# Altium PCB TetrisPlaca.PcbDoc
Units mil, origin at the board's own origin, x right, y up, seen from the top; angles counter-clockwise.
Board outline 3950 x 1780 mil, 2 copper layers (Top Layer, Bottom Layer); 63 components, 28 nets, 142 pads, 0 vias.
Unrouted connection lines stored in the file: 1.
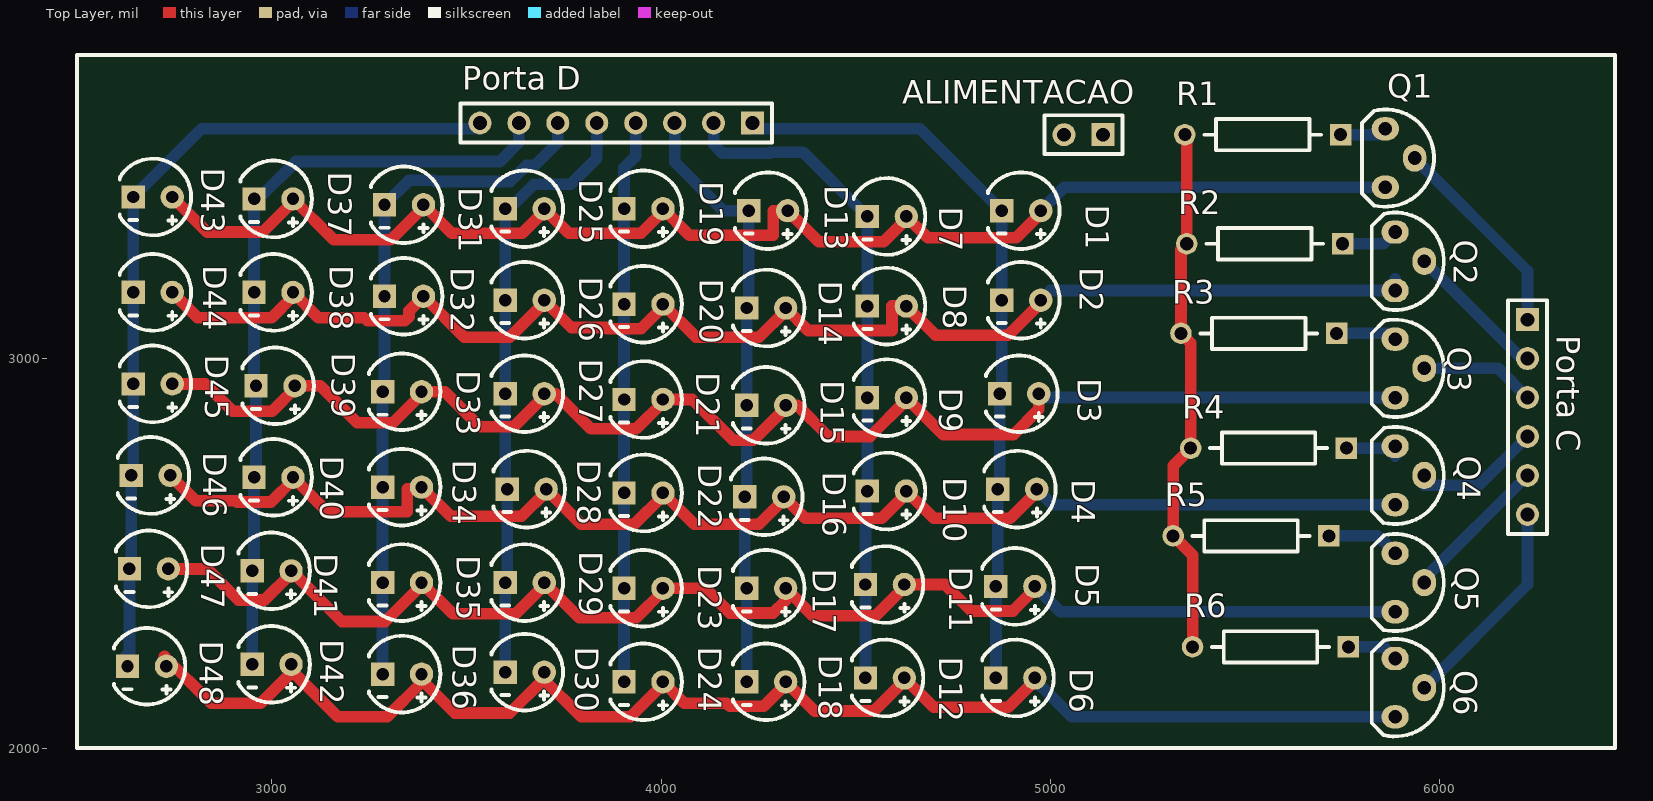
[diagram p0: Top Layer view]
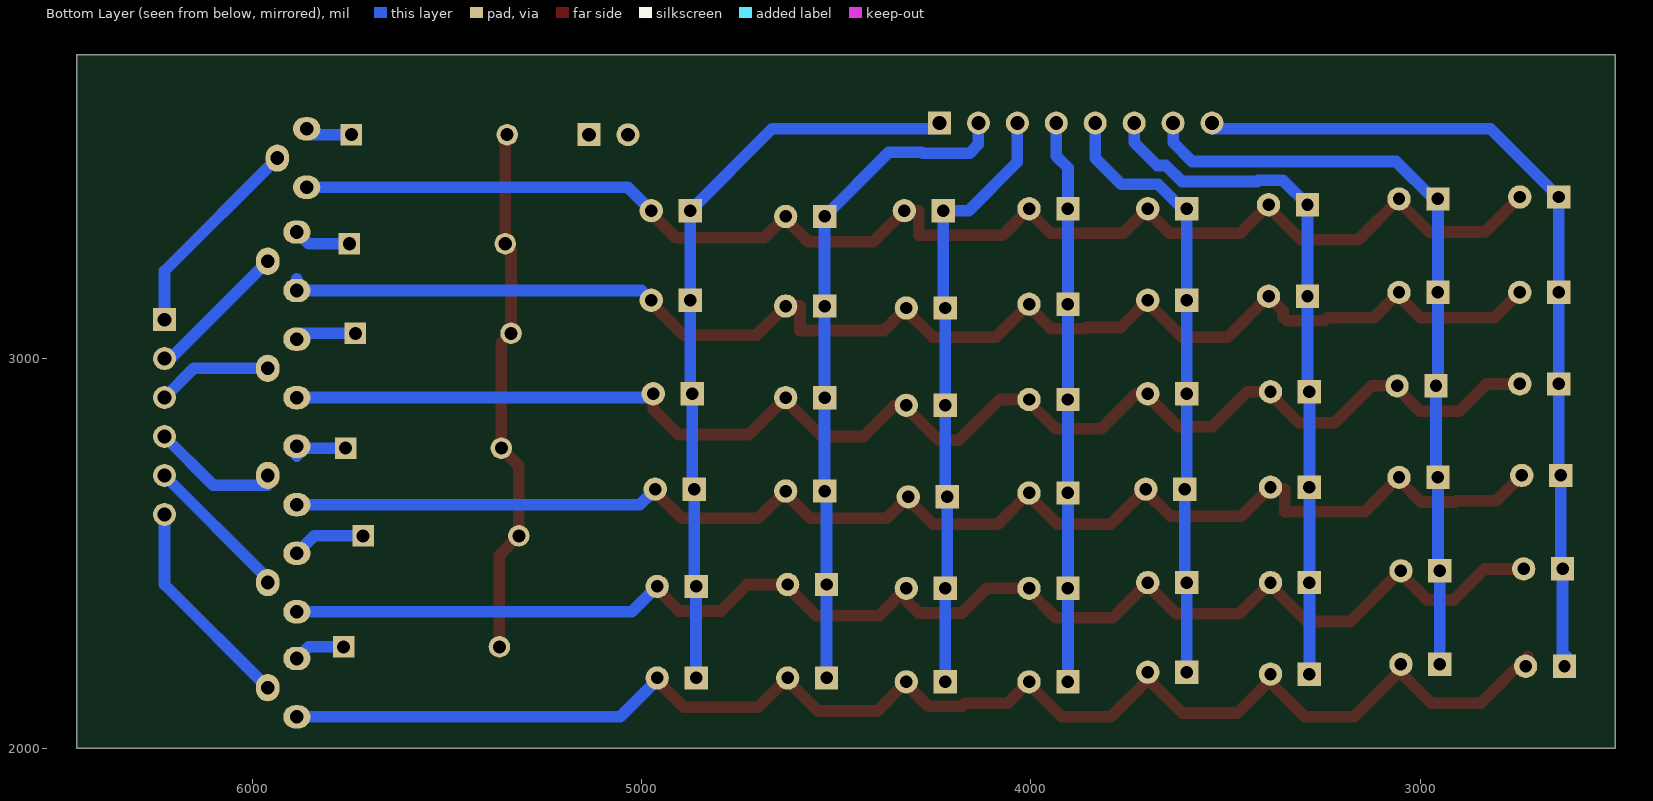
[diagram p1: Bottom Layer view, seen from below]
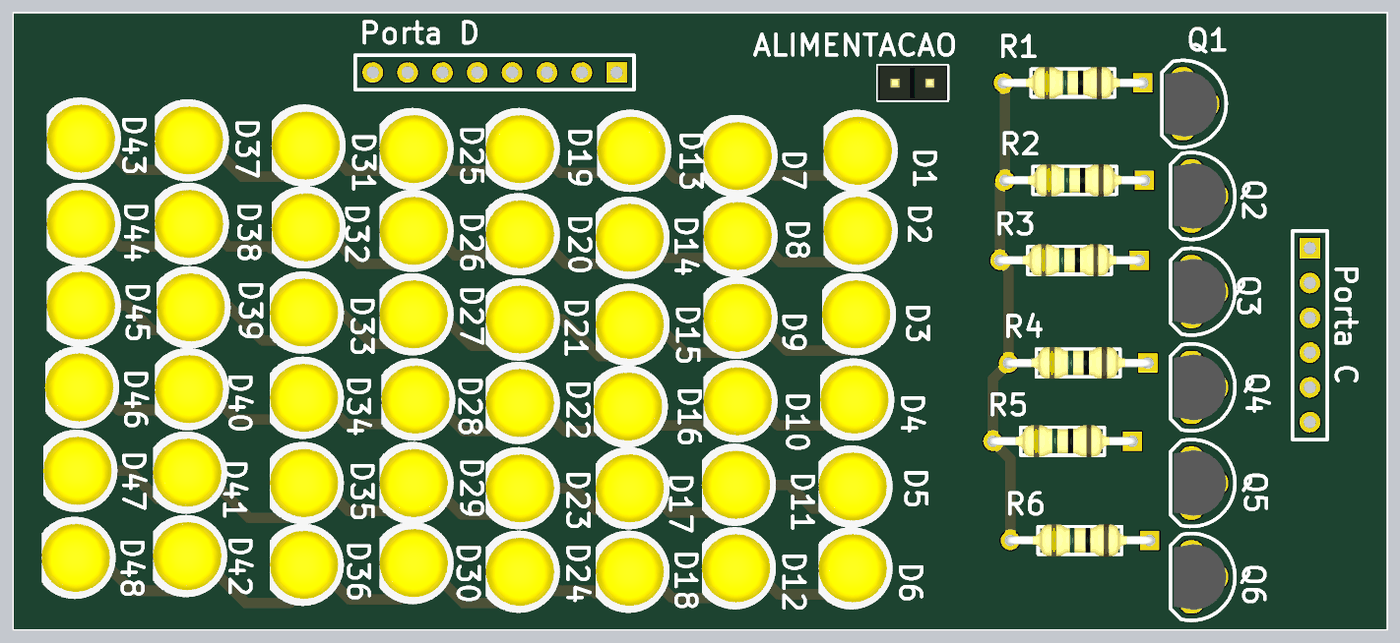
[diagram p2: 3D render of the assembled board from above, using the file's embedded part models]

## Layer stack, top to bottom
Top Solder: solder mask 0.4, Solder Resist, Dk 3.5
Top Layer: signal copper 1.4
Dielectric 1: dielectric 12.6, FR-4, Dk 4.8
Bottom Layer: signal copper 1.4
Bottom Solder: solder mask 0.4, Solder Resist, Dk 3.5

## Board outline
2500,2000 2500,3780 6450,3780 6450,2000

## Design rules (kind name [scope] priority, off if disabled: settings)
Clearance [All] p1: gap=18 ignorepadtopadclearanceinfootprint=FALSE except(0: Arc-Hole Track-Hole SMDPad-Hole THPad-Hole Via-Hole Fill-Hole Poly-Hole Region-Hole Text-Hole)
ComponentClearance [All] p1: gap=0 collisioncheckmode=3 verticalgap=0 showdistances=FALSE
Height [All] p1: minheight=0 maxheight=6000 prefheight=500
HoleSize [All] p1: absolutevalues=TRUE maxlimit=280 minlimit=1 maxpercent=80.000 minpercent=20.000
HoleToHoleClearance [All] p1: gap=5 allowstackedmicrovias=TRUE
MinimumSolderMaskSliver [All] p1: minsoldermaskwidth=5
PlaneClearance [All] p1: clearance=30
PlaneConnect [All] p1: planeconnectstyle=Direct reliefexpansion=10 reliefentries=4 reliefconductorwidth=20 reliefairgap=10
PolygonConnect [All] p1: connectstyle=Direct reliefconductorwidth=10 reliefentries=4 polygonreliefangle="90 Angle" airgapwidth=10
RoutingVias [All] p1: holewidth=28 width=50 viastyle="Through Hole" minholewidth=20 minwidth=50 maxholewidth=200 maxwidth=500
SilkToSilkClearance [All] p1: silktosilkclearance=0
SilkToSolderMaskClearance [IsPad] p1: minsilkscreentomaskgap=0 clearancetoexposedcopper=TRUE
SolderMaskExpansion [All] p1: expansion=4
UnpouredPolygon UnpouredPolygon_1 [All] p2:
Width [All] p1: maxlimit=60 minlimit=30 preferedwidth=30 checkconnectedcopper=TRUE
21 further rules are at their usual default settings.

## Classes and differential pairs
component class Tetris: ALIMENTACAO D1 D2 D3 D4 D5 D6 D7 D8 D9 D10 D11 D12 D13 D14 D15 D16 D17 D18 D19 D20 D21 D22 D23 D24 D25 D26 D27 D28 D29 D30 D31 D32 D33 D34 D35 D36 D37 D38 D39 D40 D41 D42 D43 D44 D45 D46 D47 D48 "Porta D" Q1 Q2 Q3 Q4 Q5 Q6 R1 R5 R6

## Components (designator, comment, footprint, x,y, rotation, side; value= is the part's Value field where it differs from the comment)
ALIMENTACAO "Header 2" HDR1X2 5135,3575 r180 top
D1 "COLOR" TO1-5mm-Yellow 4875,3380 r0 top
D2 "COLOR" TO1-5mm-Yellow 4875,3150 r0 top
D3 "COLOR" TO1-5mm-Yellow 4870,2910 r0 top
D4 "COLOR" TO1-5mm-Yellow 4865,2665 r0 top
D5 "COLOR" TO1-5mm-Yellow 4860,2415 r0 top
D6 "COLOR" TO1-5mm-Yellow 4860,2180 r0 top
D7 "COLOR" TO1-5mm-Yellow 4530,3365 r0 top
D8 "COLOR" TO1-5mm-Yellow 4530,3135 r0 top
D9 "COLOR" TO1-5mm-Yellow 4530,2900 r0 top
D10 "COLOR" TO1-5mm-Yellow 4530,2660 r0 top
D11 "COLOR" TO1-5mm-Yellow 4525,2420 r0 top
D12 "COLOR" TO1-5mm-Yellow 4525,2180 r0 top
D13 "COLOR" TO1-5mm-Yellow 4225,3380 r0 top
D14 "COLOR" TO1-5mm-Yellow 4220,3130 r0 top
D15 "COLOR" TO1-5mm-Yellow 4220,2880 r0 top
D16 "COLOR" TO1-5mm-Yellow 4215,2645 r0 top
D17 "COLOR" TO1-5mm-Yellow 4220,2410 r0 top
D18 "COLOR" TO1-5mm-Yellow 4220,2170 r0 top
D19 "COLOR" TO1-5mm-Yellow 3905,3385 r0 top
D20 "COLOR" TO1-5mm-Yellow 3905,3140 r0 top
D21 "COLOR" TO1-5mm-Yellow 3905,2895 r0 top
D22 "COLOR" TO1-5mm-Yellow 3905,2655 r0 top
D23 "COLOR" TO1-5mm-Yellow 3905,2410 r0 top
D24 "COLOR" TO1-5mm-Yellow 3905,2170 r0 top
D25 "COLOR" TO1-5mm-Yellow 3600,3385 r0 top
D26 "COLOR" TO1-5mm-Yellow 3600,3150 r0 top
D27 "COLOR" TO1-5mm-Yellow 3600,2910 r0 top
D28 "COLOR" TO1-5mm-Yellow 3605,2665 r0 top
D29 "COLOR" TO1-5mm-Yellow 3600,2425 r0 top
D30 "COLOR" TO1-5mm-Yellow 3600,2195 r0 top
D31 "COLOR" TO1-5mm-Yellow 3290,3395 r0 top
D32 "COLOR" TO1-5mm-Yellow 3290,3160 r0 top
D33 "COLOR" TO1-5mm-Yellow 3285,2915 r0 top
D34 "COLOR" TO1-5mm-Yellow 3285,2670 r0 top
D35 "COLOR" TO1-5mm-Yellow 3285,2425 r0 top
D36 "COLOR" TO1-5mm-Yellow 3285,2190 r0 top
D37 "COLOR" TO1-5mm-Yellow 2955,3410 r0 top
D38 "COLOR" TO1-5mm-Yellow 2955,3170 r0 top
D39 "COLOR" TO1-5mm-Yellow 2960,2930 r0 top
D40 "COLOR" TO1-5mm-Yellow 2955,2695 r0 top
D41 "COLOR" TO1-5mm-Yellow 2950,2455 r0 top
D42 "COLOR" TO1-5mm-Yellow 2950,2215 r0 top
D43 "COLOR" TO1-5mm-Yellow 2645,3415 r0 top
D44 "COLOR" TO1-5mm-Yellow 2645,3170 r0 top
D45 "COLOR" TO1-5mm-Yellow 2645,2935 r0 top
D46 "COLOR" TO1-5mm-Yellow 2640,2700 r0 top
D47 "COLOR" TO1-5mm-Yellow 2635,2460 r0 top
D48 "COLOR" TO1-5mm-Yellow 2630,2210 r0 top
"Porta C" "Header 6" HDR1X6 6225,3100 r270 top
"Porta D" "Header 8" HDR1X8 4235,3605 r180 top
Q1 "BC547" TO-92/CBE 5860,3590 r270 top
Q2 "BC547" TO-92/CBE 5885,3325 r270 top
Q3 "BC547" TO-92/CBE 5885,3050 r270 top
Q4 "BC547" TO-92/CBE 5885,2775 r270 top
Q5 "BC547" TO-92/CBE 5885,2500 r270 top
Q6 "BC547" TO-92/CBE 5885,2230 r270 top
R1 "Value" R400-2.0mm 5745,3575 r180 top
R2 "Value" R400-2.0mm 5750,3295 r180 top
R3 "Value" R400-2.0mm 5735,3065 r180 top
R4 "Value" R400-2.0mm 5760,2770 r180 top
R5 "Value" R400-2.0mm 5715,2545 r180 top
R6 "Value" R400-2.0mm 5765,2260 r180 top

## Footprints (in the part's own frame and the unit in brackets; to place one, negate y for a bottom-side part, rotate by r counter-clockwise, add the part's x,y. Pads: shape width x height; smd on the part's side, far side on the other; paste and mask are expansions set on the pad)
HDR1X2 [mm] "Connector; Header; 2 Position"
  rect 1.5x1.5 hole 0.9: 1(0,0)
  round 1.5 hole 0.9: 2(2.54,0)
  silkscreen extent -1.27,-1.27 3.81,1.27, body extent -1.24,-1.27 3.84,1.27, height 8.68
HDR1X6 [mm] "Connector; Header; 6 Position"
  rect 1.5x1.5 hole 0.9: 1(0,0)
  round 1.5 hole 0.9: 2(2.54,0) 3(5.08,0) 4(7.62,0) 5(10.16,0) 6(12.7,0)
  silkscreen extent -1.27,-1.27 13.97,1.27
HDR1X8 [mm] "Connector; Header; 8 Position"
  rect 1.5x1.5 hole 0.9: 1(0,0)
  round 1.5 hole 0.9: 2(2.54,0) 3(5.08,0) 4(7.62,0) 5(10.16,0) 6(12.7,0) 7(15.24,0) 8(17.78,0)
  silkscreen extent -1.27,-1.27 19.05,1.27
R400-2.0mm [mm] "Axial Device, Thru-Hole; 2 Leads; 0.4 in Pin Spacing"
  rect 1.4x1.4 hole 0.85: 1(0,0)
  round 1.4 hole 0.85: 2(10.16,0)
  silkscreen extent 1.27,-1.02 8.89,1.02, body extent -0.3,-1.17 10.46,1.14, height 2.93
TO1-5mm-Yellow [mil] "LED 5mm Yellow"
  round 60 hole 32: A(100,0)
  rect 60x60 hole 32: K(0,0)
  silkscreen extent -35,-98 148,98, body extent -46,-118 167,118, height 345
TO-92/CBE [mil] "Transistor Outline Package, Case Style 92 CBE; 3D Sergey Atanov"
  oval 70x60 hole 35: B(75,75)
  oval 60x70 hole 35: C(0,0) E(150,0)
  silkscreen extent -50,-60 200,125, body extent -37,-50 187,100, height 239

## Part data
ALIMENTACAO: "Header, 2-Pin", LatestRevisionDate=17-Jul-2002, LatestRevisionNote="Re-released for DXP Platform.", Publisher="Altium Limited"
D1 D2 D3 D4 D5 D6 D7 D8 D9 D10 D11 D12 D13 D14 D15 D16 D17 D18 D19 D20 D21 D22 D23 D24 D25 D26 D27 D28 D29 D30 D31 D32 D33 D34 D35 D36 D37 D38 D39 D40 D41 D42 D43 D44 D45 D46 D47 D48: library part LED, "Light Emitting Diode"
"Porta C": "Header, 6-Pin", LatestRevisionDate=17-Jul-2002, LatestRevisionNote="Re-released for DXP Platform.", Publisher="Altium Limited"
"Porta D": "Header, 8-Pin", LatestRevisionDate=17-Jul-2002, LatestRevisionNote="Re-released for DXP Platform.", Publisher="Altium Limited"
Q1 Q2 Q3 Q4 Q5 Q6: "NPN Epitaxial Silicon Transistor", Collector-Base Voltage (Vcb)="50 V", Collector-Emitter Voltage (Vce)="45 V", Collector Current (Ic)="100 mA", DC Current Gain Max (hfe)=800, DC Current Gain Min (hfe)=110, Emitter-Base Voltage (Veb)="6 V", Total Power Dissipation (Ptot)="500 mW", Transition Frequency (fT)="300 MHz", Complementary Part=BC557
R1 R2 R3 R4 R5 R6: library part Resistor, "Resistor", Tolerance=5%, LatestRevisionDate=17-Jul-2002, LatestRevisionNote="Re-released for DXP Platform.", PackageReference=AXIAL-0.3, Published=8-Jun-2000, Publisher="Altium Limited"

## Nets (pads, with @x,y where several pads share a name; then routed paths per layer and width w, separated by ;. In a path a pad name is that pad's centre, name@x,y a point inside that pad or via, vN(x,y) a via of type N, cw(c..) or ccw(c..) an arc to the next point about the centre after c; other vN are vias at no path point)
GND: ALIMENTACAO.2
NetD1_A: D1.A D7.A D13.A D19.A D25.A D31.A D37.A D43.A Q1.E | length 3628.1
  Top Layer w30: D43.A 2835,3325 2976.67,3325 3055,3403.33 D37.A 3160,3305 3306.67,3305 3390,3388.33 D31.A 3463,3322 3643.67,3322 3700,3378.33 D25.A 3763,3322 3948.67,3322 4005,3378.33 D19.A 4073,3317 4288,3317 4288,3380 D13.A 4405,3300 4571.67,3300 4630,3358.33 D7.A 4685,3310 4911.67,3310 4975,3373.33 D1.A
  Bottom Layer w30: D1.A 5035,3440 Q1.E
NetD1_K: "Porta D.1" D1.K D2.K D3.K D4.K D5.K D6.K | length 1933.2
  Bottom Layer w30: 4235,3590 4665,3590 D1.K D2.K 4875,2915 D3.K 4870,2670 D4.K 4865,2420 D5.K D6.K
NetD2_A: D2.A D8.A D14.A D20.A D26.A D32.A D38.A D44.A Q2.E | length 3681.6
  Top Layer w30: D44.A 2810,3105 3000,3105 3055,3160 D38.A 3120,3105 3238.33,3105 3246.33,3097 3342,3097 3353,3108 3353,3123 D32.A 3495,3055 3611.67,3055 3700,3143.33 D26.A 3770,3080 3858.33,3080 3861.33,3077 3948.67,3077 4005,3133.33 D20.A 4090,3055 4251.67,3055 4320,3123.33 D14.A 4378,3072 4593,3072 4593,3135 D8.A 4705,3060 4891.67,3060 4975,3143.33 D2.A
  Bottom Layer w30: D2.A 5000,3175 Q2.E 5885,3205
NetD3_A: D3.A D9.A D15.A D21.A D27.A D33.A D39.A D45.A Q3.E | length 3698.4
  Top Layer w30: D45.A 2830,2935 2900,2865 3001.67,2865 3060,2923.33 D39.A 3125,2930 3220,2835 3311.67,2835 3385,2908.33 D33.A 3445,2915 3535,2825 3621.67,2825 3700,2903.33 D27.A 3730,2910 3820,2820 3936.67,2820 4005,2888.33 D21.A 4080,2895 4185,2790 4236.67,2790 4320,2873.33 D15.A 4350,2880 4430,2800 4536.67,2800 4630,2893.33 D9.A 4725,2805 4905,2805 4970,2870 D3.A
  Bottom Layer w30: D3.A 4980,2900 Q3.E
NetD4_A: D4.A D10.A D16.A D22.A D28.A D34.A D40.A D46.A Q4.E | length 3643.2
  Top Layer w30: D46.A 2805,2635 2908.33,2635 2911.33,2632 2998.67,2632 3055,2688.33 D40.A 3143,2607 3348,2607 3348,2665 D34.A@3390,2665 ; D34.A D34.A@3390,2665 ; D4.A 4965,2658.33 4896.67,2590 4700,2590 D10.A 4630,2653.33 4566.67,2590 4370,2590 D16.A 4315,2638.33 4251.67,2575 4085,2575 D22.A 4005,2648.33 3931.67,2575 3795,2575 D28.A 3705,2658.33 3641.67,2595 3460,2595 D34.A@3390,2665
  Bottom Layer w30: D4.A 5005,2625 Q4.E
NetD5_A: D5.A D11.A D17.A D23.A D29.A D35.A D41.A D47.A Q5.E | length 3681.2
  Top Layer w30: D47.A 2835,2460 2915,2380 2981.67,2380 3050,2448.33 D41.A 3180,2325 3291.67,2325 3385,2418.33 D35.A 3465,2345 3626.67,2345 3700,2418.33 D29.A 3790,2335 3936.67,2335 4005,2403.33 D23.A 4113.33,2410 4176.33,2347 4288,2347 4320,2379 D17.A 4390,2340 4551.67,2340 4625,2413.33 D11.A 4729,2420 4797,2352 4903.67,2352 4960,2408.33 D5.A
  Bottom Layer w30: D5.A 5025,2350 Q5.E
NetD6_A: D6.A D12.A D18.A D24.A D30.A D36.A D42.A D48.A Q6.E | length 3737.5
  Top Layer w30: D48.A@2725,2235 2845,2115 2971.67,2115 3050,2193.33 3050,2200 3170,2080 3296.67,2080 3385,2168.33 3385,2175 3470,2090 3611.67,2090 3695,2173.33 3695,2180 3795,2080 3921.67,2080 4005,2163.33 D24.A 4060,2115 4168.33,2115 4176.33,2107 4263.67,2107 4320,2163.33 D18.A 4395,2095 4546.67,2095 4625,2173.33 D12.A 4700,2105 4891.67,2105 4960,2173.33 D6.A
  Bottom Layer w30: D6.A 4960,2175 5055,2080 Q6.E
NetD7_K: "Porta D.2" D7.K D8.K D9.K D10.K D11.K D12.K | length 1700.8
  Bottom Layer w30: 4135,3590 4135,3550 4157.53,3527.47 4278.2,3527.47 4280.72,3530 4365,3530 D7.K D8.K D9.K D10.K 4525,2655 D11.K D12.K
NetD13_K: "Porta D.3" D13.K D14.K D15.K D16.K D17.K D18.K | length 1558
  Bottom Layer w30: 4035,3605 4035,3505 4160,3380 D13.K 4225,3135 D14.K D15.K 4220,2650 D16.K 4215,2415 D17.K D18.K
NetD19_K: "Porta D.4" D19.K D20.K D21.K D22.K D23.K D24.K | length 1447.4
  Bottom Layer w30: D24.K D23.K D22.K D21.K D20.K D19.K 3905,3490 3935,3520 3935,3605
NetD25_K: "Porta D.5" D25.K D26.K D27.K D28.K D29.K D30.K | length 1575.1
  Bottom Layer w30: D30.K@3595,2180 3600,2185 D30.K D29.K 3605,2430 D28.K 3600,2670 D27.K D26.K D25.K 3610.9,3385 3673.9,3448 3768,3448 3835,3515 3835,3590
NetD31_K: "Porta D.6" D31.K D32.K D33.K D34.K D35.K D36.K | length 1770.8
  Bottom Layer w30: D36.K@3285,2175 D36.K D35.K D34.K D33.K 3290,2920 D32.K D31.K 3353,3458 3416.1,3458 3419.1,3455 3613.02,3455 3654.02,3496 3676,3496 3735,3555 3735,3590
NetD37_K: "Porta D.7" D37.K D38.K D39.K D40.K D41.K D42.K | length 1991.3
  Bottom Layer w30: D42.K@2950,2200 D42.K D41.K 2955,2460 D40.K 2960,2700 D39.K 2955,2935 D38.K D37.K 2965.9,3410 3061.9,3506 3586,3506 3635,3555 3635,3590
NetD43_K: "Porta D.8" D43.K D44.K D45.K D46.K D47.K D48.K | length 2150.8
  Bottom Layer w30: D48.K@2625,2235 2635,2245 D47.K 2640,2465 D46.K 2645,2705 D45.K D44.K D43.K 2820,3590 3535,3590
"NetPorta C_1": "Porta C.1" Q1.B | length 535.1
  Bottom Layer w30: Q1.B 6225,3225 6225,3100
"NetPorta C_2": "Porta C.2" Q2.B | length 368.6
  Bottom Layer w30: Q2.B 6210,3000 6225,3000
"NetPorta C_3": "Porta C.3" Q3.B | length 296.1
  Bottom Layer w30: Q3.B 6150,2975 6225,2900
"NetPorta C_4": "Porta C.4" Q4.B | length 316.8
  Bottom Layer w30: Q4.B@5960,2675 6100,2675 6225,2800
"NetPorta C_5": "Porta C.5" Q5.B | length 387.7
  Bottom Layer w30: Q5.B@5965,2420 5965,2440 6225,2700
"NetPorta C_6": "Porta C.6" Q6.B | length 554.8
  Bottom Layer w30: Q6.B 6225,2420 6225,2600
NetQ1_C: Q1.C R1.1 | length 121.2
  Bottom Layer w30: R1.1 5845,3575 Q1.C
NetQ2_C: Q2.C R2.1 | length 151.5
  Bottom Layer w30: R2.1 5855,3295 Q2.C Q2.C@5880.9,3325
NetQ3_C: Q3.C R3.1 | length 161.8
  Bottom Layer w30: R3.1 5870,3065 Q3.C Q3.C@5885,3044.44
NetQ4_C: Q4.C R4.1 | length 134.1
  Bottom Layer w30: R4.1 5880,2770 Q4.C ; Q4.C@5880,2755 Q4.C@5885,2750
NetQ5_C: Q5.C R5.1 | length 188.6
  Bottom Layer w30: R5.1 5840,2545 Q5.C
NetQ6_C: Q6.C R6.1 | length 132.4
  Bottom Layer w30: R6.1 5855,2260 Q6.C
VCC: ALIMENTACAO.1 R1.2 R2.2 R3.2 R4.2 R5.2 R6.2 | length 1373
  Top Layer w30: R1.2 5350,3570 R2.2 5335,3280 R3.2 5360,3040 R4.2 5315,2725 R5.2 5365,2495 R6.2

## Silkscreen, mask and mechanical layers (free items; w line width, h text height)
Top Overlay:
  the board outline again, w10